# Altium PCB 飞控PCB.PcbDoc
Units mil, origin at the board's own origin, x right, y up, seen from the top; angles counter-clockwise.
Board outline 1240.05 x 855.03 mil, 2 copper layers (Top Layer, Bottom Layer); 32 components, 51 nets, 199 pads, 48 vias.
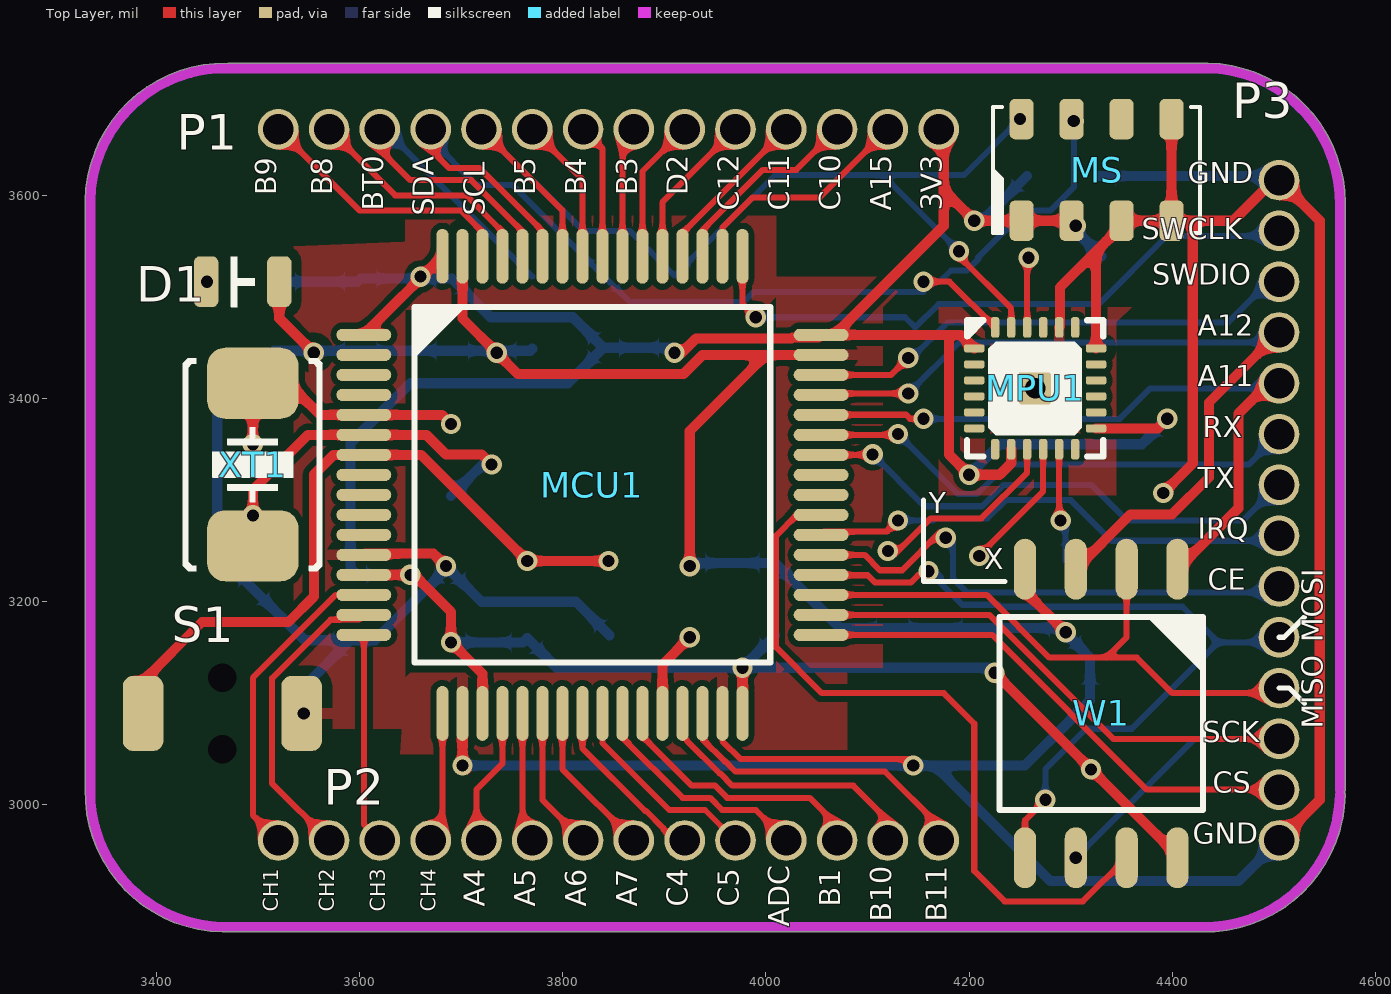
[diagram p0: Top Layer view]
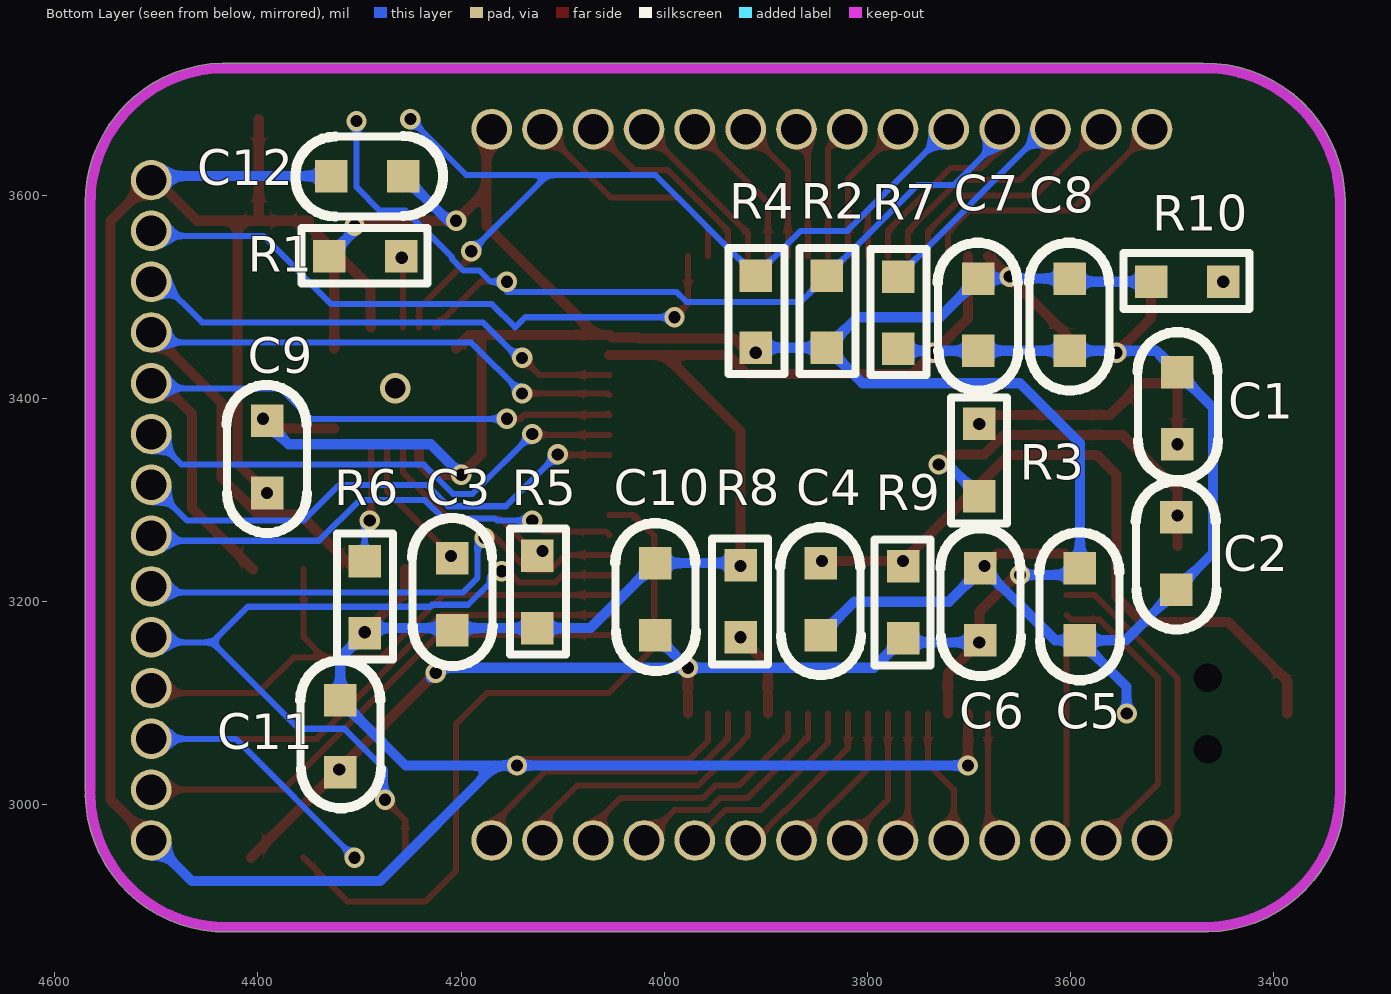
[diagram p1: Bottom Layer view, seen from below]
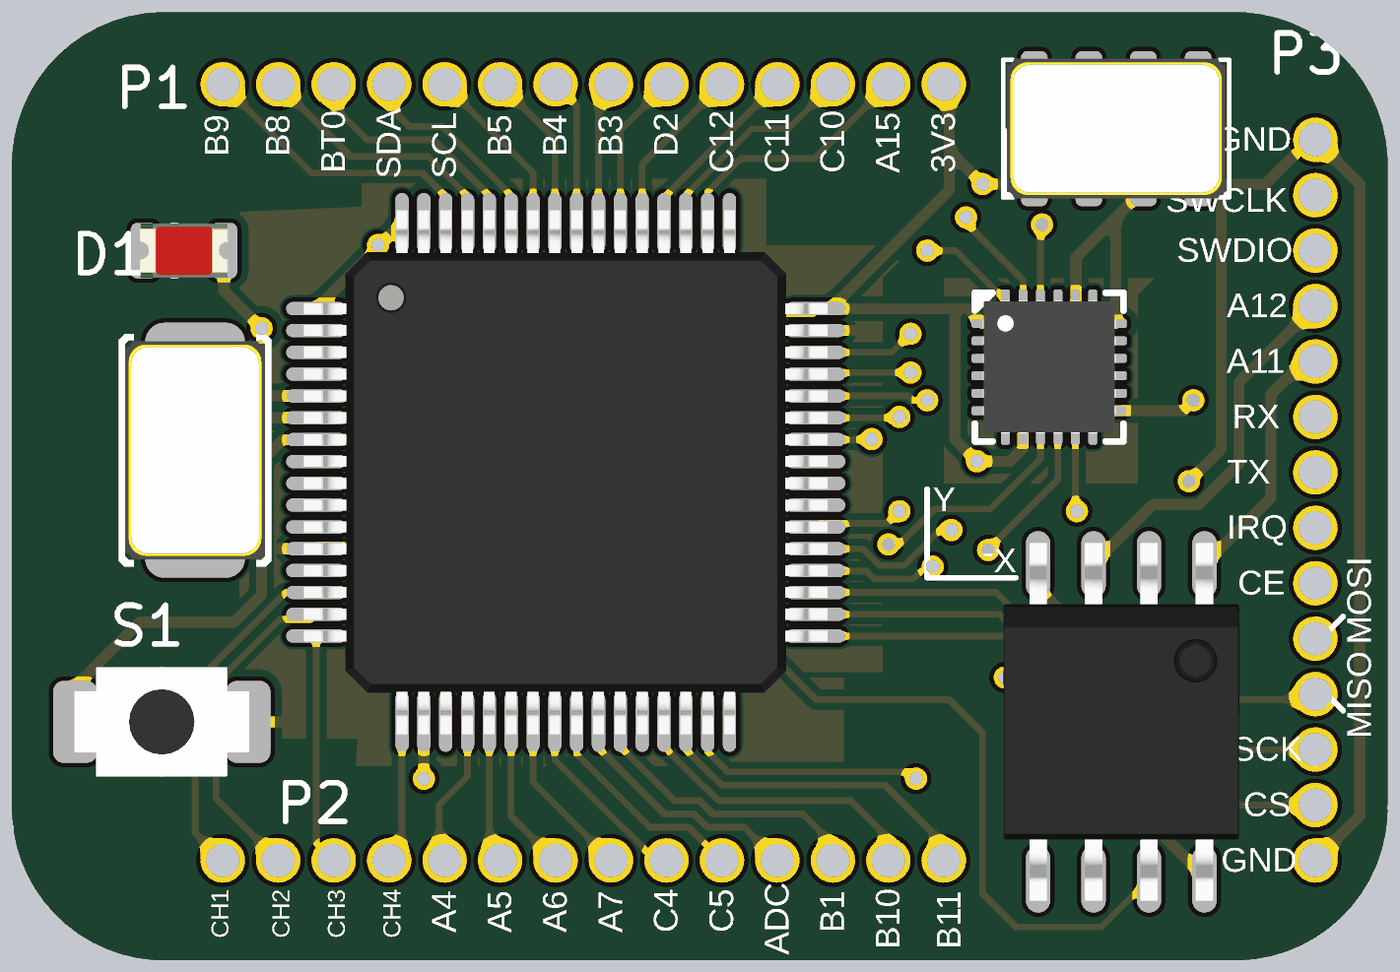
[diagram p2: 3D render of the assembled board from above, using the file's embedded part models]
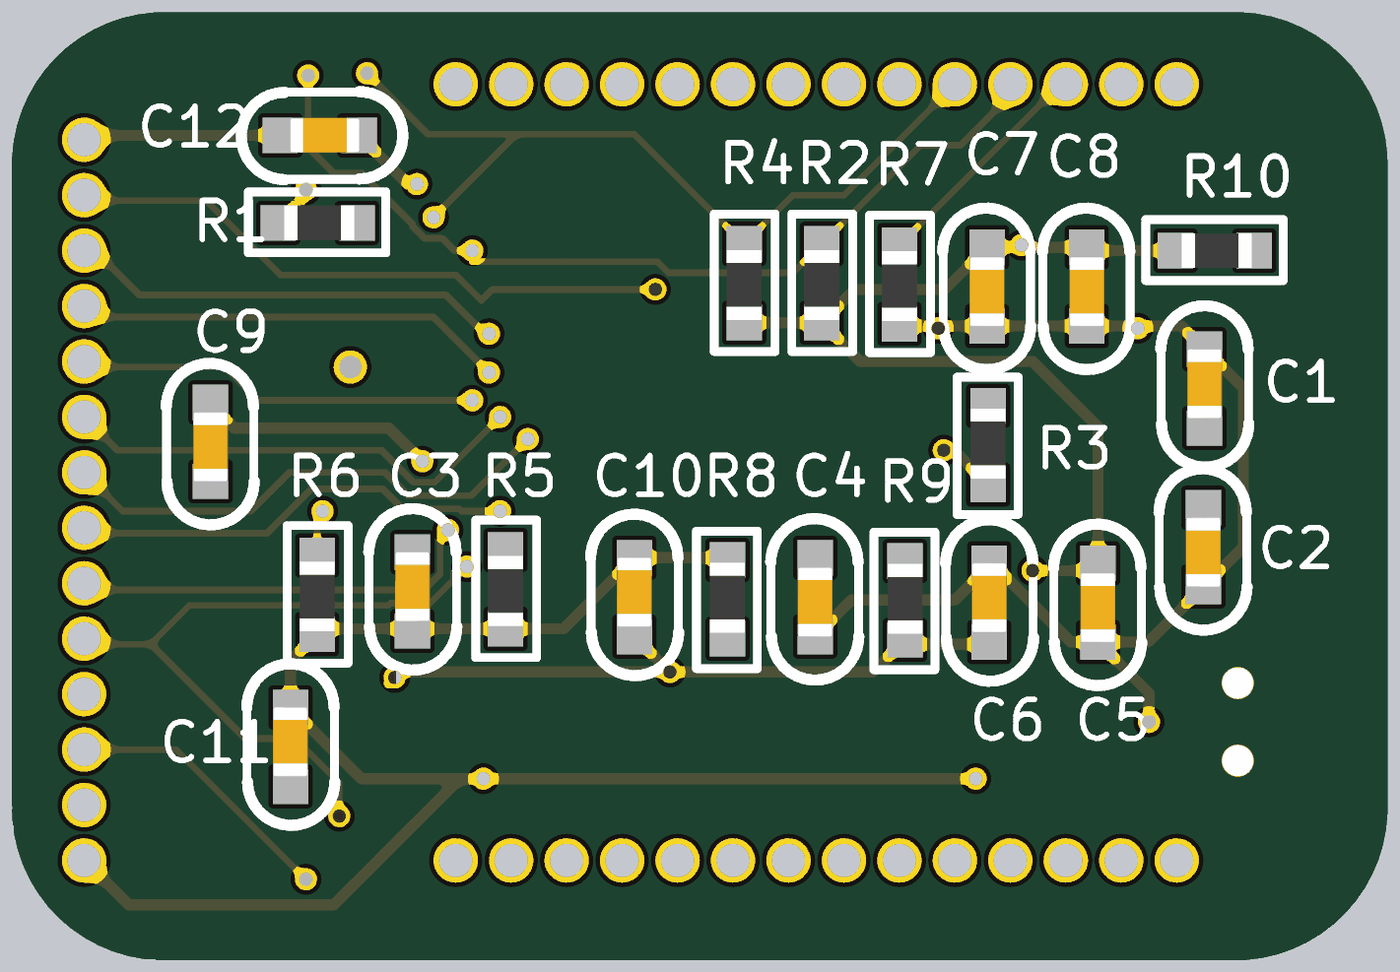
[diagram p3: 3D render of the assembled board from below, using the file's embedded part models]

## Layer stack, top to bottom
Top Solder: solder mask 0.4, Solder Resist, Dk 3.5
Top Layer: signal copper 1.4
Dielectric 1: dielectric 12.6, FR-4, Dk 4.8
Bottom Layer: signal copper 1.4
Bottom Solder: solder mask 0.4, Solder Resist, Dk 3.5

## Board outline
3329.99,3015.05 ccw(c3467.5,3012.5) 3464.91,2874.99 ccw(c3465,2880) 3465,2874.99 4429.95,2874.99 ccw(c4432.5,3012.5) 4570.01,3009.91 ccw(c4565,3010) 4570.02,3010 ccw(c4565,3010) 4569.35,3012.5 ccw(c4565,3015) 4570.02,3015 4570.02,3589.95 ccw(c4432.5,3592.5) 4570.04,3592.5 ccw(c4432.5,3592.5) 4435.09,3730.01 ccw(c4435,3725) 4435,3730.01 3470.05,3730.01 cw(c3467.5,3592.5) 3470.09,3730.01 3470.05,3730.01 ccw(c3467.5,3592.5) 3329.99,3595.09 ccw(c3335,3595) 3329.99,3595 3329.99,3015.05 cw(c3467.5,3012.5)

## Design rules (kind name [scope] priority, off if disabled: settings)
Clearance [All] p1: gap=6 ignorepadtopadclearanceinfootprint=FALSE
PolygonConnect [All] p1: connectstyle=Relief reliefconductorwidth=10 reliefentries=4 polygonreliefangle="90 Angle" airgapwidth=10
RoutingVias [All] p1: holewidth=28 width=50 viastyle="Through Hole" minholewidth=28 minwidth=50 maxholewidth=28 maxwidth=50
SolderMaskExpansion [All] p1: expansion=4
Width [All] p1: maxlimit=10 minlimit=6 preferedwidth=10 minimp=50.000000 maximp=50.000000 favimp=50.000000
30 further rules are at their usual default settings.

## Components (designator, comment, footprint, x,y, rotation, side; value= is the part's Value field where it differs from the comment)
C1 "Cap_0603" CAP_0603 3496,3393 r270 bottom value=20pf
C2 "Cap_0603" CAP_0603 3495,3245 r90 bottom value=20pf
C3 "Cap_0603" CAP_0603 4210,3210 r270 bottom value=0.1u
C4 "Cap_0603" CAP_0603 3845,3200 r90 bottom value=0.1u
C5 "Cap_0603" CAP_0603 3590,3195 r90 bottom value=0.1u
C6 "Cap_0603" CAP_0603 3690,3200 r270 bottom value=0.1u
C7 "Cap_0603" CAP_0603 3690,3480 r90 bottom value=0.1u
C8 "Cap_0603" CAP_0603 3600,3480 r90 bottom value=0.1u
C9 "Cap_0603" CAP_0603 4390,3340 r90 bottom value=0.1u
C10 "Cap_0603" CAP_0603 4010,3205 r270 bottom value=0.1u
C11 "Cap_0603" CAP_0603 4320,3070 r270 bottom value=0.1u
C12 "Cap_0603" CAP_0603 4290,3620 r0 bottom value=0.1u
D1 "LED_0805" LED_0805_RED 3485,3515 r0 top
MCU1 "STM32F103RC" LQFP_P0.5_64 3829.21,3315 r0 top
MPU1 "MPU9250" QFN_P0.4_24 4265,3410 r0 top
MS "MS5611" OTHER_MS5611_8 4325.39,3625 r90 top (schematic designator MS1)
P1 "HDR1X14_1.27" HDR1X14_1.27 3820,3665 r90 top
P2 "HDR1X14_1.27" HDR1X14_1.27 3820,2965 r90 top
P3 "HDR1X14_1.27" HDR1X14_1.27 4505,3315 r0 top
R1 "Res_0603" RES_0603 4293,3622 r180 bottom value=10K
R2 "Res_0603" RES_0603 3758,3484 r270 bottom value=10K
R3 "Res_0603" RES_0603 3772,3341 r90 bottom value=1M
R4 "Res_0603" RES_0603 3828,3484 r270 bottom value=10K
R5 "Res_0603" RES_0603 4043,3208 r270 bottom value=10K
R6 "Res_0603" RES_0603 4213,3203 r270 bottom value=10K
R7 "Res_0603" RES_0603 3688,3483 r270 bottom value=10K
R8 "Res_0603" RES_0603 4007,3202 r90 bottom value=10K
R9 "Res_0603" RES_0603 3847,3201 r90 bottom value=10K
R10 "Res_0603" RES_0603 3484,3597 r180 bottom value=10K
S1 "ButtonTACT_3x4x2_180" ButtonTACT_3x4x2_180H 3465,3090 r0 top
W1 "W25Q_8" SOIC_E200_8 4330,3090 r270 top
XT1 "XTAL_5032_2P" XT_5032_2 3495,3335 r90 top value=8M

## Footprints (in the part's own frame and the unit in brackets; to place one, negate y for a bottom-side part, rotate by r counter-clockwise, add the part's x,y. Pads: shape width x height; smd on the part's side, far side on the other; paste and mask are expansions set on the pad)
ButtonTACT_3x4x2_180H [mil]
  round 0 hole 28: 0(0,-35) 0(0,35)
  rrect50% 40x74 smd: 1(-78,0) 2(78,0)
  body extent -79,-49 79,49, height 63
CAP_0603 [mil]
  rect 32x32 smd: 1(-33,1) 2(38,1)
  silkscreen extent -72,-38 73,41, body extent -33,-15 30,17, height 31
HDR1X14_1.27 [mil]
  round 40 hole 30: 1(0,300) 2(0,250) 3(0,200) 4(0,150) 5(0,100) 6(0,50) 7(0,0) 8(0,-50) 9(0,-100) 10(0,-150) 11(0,-200) 12(0,-250) 13(0,-300) 14(0,-350)
LED_0805_RED [mil]
  rrect50% 24x50 smd: 1(-36,0) 2(36,0)
  silkscreen extent -12,-24 12,24, body extent -40,-25 40,25, height 43
LQFP_P0.5_64 [mil]
  oval 54x12 smd: 1(-225,147.64) 2(-225,127.95) 3(-225,108.27) 4(-225,88.58) 5(-225,68.9) 6(-225,49.21) 7(-225,29.53) 8(-225,9.84) 9(-225,-9.84) 10(-225,-29.53) 11(-225,-49.21) 12(-225,-68.9) 13(-225,-88.58) 14(-225,-108.27) 15(-225,-127.95) 16(-225,-147.64) 33(225,-147.64) 34(225,-127.95) 35(225,-108.27) 36(225,-88.58) 37(225,-68.9) 38(225,-49.21) 39(225,-29.53) 40(225,-9.84) 41(225,9.84) 42(225,29.53) 43(225,49.21) 44(225,68.9) 45(225,88.58) 46(225,108.27) 47(225,127.95) 48(225,147.64)
  oval 12x54 smd: 17(-147.64,-225) 18(-127.95,-225) 19(-108.27,-225) 20(-88.58,-225) 21(-68.9,-225) 22(-49.21,-225) 23(-29.53,-225) 24(-9.84,-225) 25(9.84,-225) 26(29.53,-225) 27(49.21,-225) 28(68.9,-225) 29(88.58,-225) 30(108.27,-225) 31(127.95,-225) 32(147.64,-225) 49(147.64,225) 50(127.95,225) 51(108.27,225) 52(88.58,225) 53(68.9,225) 54(49.21,225) 55(29.53,225) 56(9.84,225) 57(-9.84,225) 58(-29.53,225) 59(-49.21,225) 60(-68.9,225) 61(-88.58,225) 62(-108.27,225) 63(-127.95,225) 64(-147.64,225)
  silkscreen extent -175,-175 175,175, body extent -236,-236 236,236, height 59
OTHER_MS5611_8 [mil]
  rrect50% 40x24 smd: 1(-50,73.82) 2(-50,24.61) 3(-50,-24.61) 4(-50,-73.82) 5(50,-73.82) 6(50,-24.61) 7(50,24.61) 8(50,73.82)
  silkscreen extent -62,-102 62,102, body extent -63,-98 63,98, height 39
QFN_P0.4_24 [mil]
  rrect50% 20x8 smd: 1(-60,39.37) 2(-60,23.62) 3(-60,7.87) 4(-60,-7.87) 5(-60,-23.62) 6(-60,-39.37) 13(60,-39.37) 14(60,-23.62) 15(60,-7.87) 16(60,7.87) 17(60,23.62) 18(60,39.37)
  rrect50% 8x20 smd: 7(-39.37,-60) 8(-23.62,-60) 9(-7.87,-60) 10(7.87,-60) 11(23.62,-60) 12(39.37,-60) 19(39.37,60) 20(23.62,60) 21(7.87,60) 22(-7.87,60) 23(-23.62,60) 24(-39.37,60)
  rrect20% 45x45 smd: 25(0,0)
  silkscreen extent -67,-67 67,67, body extent -60,-60 60,60, height 39
RES_0603 [mil]
  rect 32x32 smd: 1(-37,-82) 2(34,-82)
  silkscreen extent -64,-109 60,-54, body extent -31,-98 31,-66, height 18
SOIC_E200_8 [mil]
  oval 60x22 smd: 1(-142,75) 2(-142,25) 3(-142,-25) 4(-142,-75) 5(142,-75) 6(142,-25) 7(142,25) 8(142,75)
  silkscreen extent -95,-100 95,100, body extent -161,-106 161,106, height 84
XT_5032_2 [mil]
  rrect50% 70x90 smd: 1(-80,0) 2(80,0)
  silkscreen extent -104,-68 104,68, body extent -98,-63 98,63, height 39

## Part data
C1 C2 C3 C4 C5 C6 C7 C8 C9 C10 C11 C12: "Capacitor"
D1: "LED"
MCU1: "MCU"
MS: "Sensor"
R1 R2 R3 R4 R5 R6 R7 R8 R9 R10: "Resistor"
S1: "Button"
W1: "FLASH"
XT1: "Crystal Oscillator"

## Via types
v1: diameter 20, hole 12, Top Layer to Bottom Layer, 47 vias
v2: diameter 30, hole 20, Top Layer to Bottom Layer, 1 vias

## Nets (pads, with @x,y where several pads share a name; then routed paths per layer and width w, separated by ;. In a path a pad name is that pad's centre, name@x,y a point inside that pad or via, vN(x,y) a via of type N, cw(c..) or ccw(c..) an arc to the next point about the centre after c; other vN are vias at no path point)
3V3: C5.2 C6.2 C7.2 C8.2 C9.2 C10.2 C11.2 C12.1 MCU1.1 MCU1.13 MCU1.19 MCU1.32 MCU1.48 MCU1.64 MPU1.1 MPU1.8 MPU1.13 MS.1 MS.2 P1.14 R1.1 R2.2 R4.2 R9.1 R10.1 W1.8 | length 3410
  Top Layer w10: MCU1.13 v1(3650,3226.42) 3653.58,3226.42 3690,3190 v1(3690,3160) 3720.94,3129.06 MCU1.19 ; MCU1.1 MCU1.64 ; v1(3910,3445) 3917.07,3445 3931.02,3458.95 4025.17,3458.95 4026.17,3459.95 4051.53,3459.95 MCU1.48 MCU1.48@4067.64,3462.64 ; MCU1.32 v1(3976.85,3135) ; P1.14@4175,3650 4175,3605 ; MPU1.1 4191.73,3462.64 4185,3462.64 ; v1(4225,3130) v1(4320,3035) W1.8@4407,2948 ; MPU1.8 4241.38,3336.38 4230,3325 v1(4200,3325) 4180,3345 4180,3457.64 4185,3462.64 ; MS.2 MS.1 v1(4205,3575) 4175,3605 ; MPU1.13 4385.63,3370.63 v1(4395,3380) ; MCU1.48@4067.64,3462.64 4185,3462.64 ; MCU1.48@4067.64,3462.64 4175,3570 4175,3605
  Bottom Layer w10: R10.1 3598,3515 C8.2 C7.2 3729,3480 3810,3480 R2.2 ; v1(3650,3226.42) 3597.58,3226.42 C5.2 3591,3356 3650,3415 3805,3415 R2.2 ; v1(3690,3160) 3761,3160 R9.1 3794,3135 3975,3135 3976.85,3136.85 v1(3976.85,3135) v1@3977,3135 ; R4.2 R2.2 ; C10.2 v1@3977,3135 ; v1(4200,3325) 4230,3355 4370,3355 v1(4395,3380) ; v1(4205,3575) 4213,3575 C12.1 ; v1@4230,3125 v1(4225,3130) 4220,3135 v1@3977,3135 ; v1(4305,3570) 4305,3565 R1.1
  other v1: 3660,3520
ADC: MCU1.26 P2.11 | length 226.9
  Top Layer w6: MCU1.26 3858.74,3066.26 3918,3007 3944.97,3007 3956.97,2995 3990,2995 P2.11
BOOT0: MCU1.60 P1.3 R7.1 | length 428.3
  Top Layer w6: P1.3 3620,3645 3650,3615 3710,3615 3760.32,3564.68 MCU1.60
  Bottom Layer w6: P1.3 3625,3665 R7.1
BOOT1: MCU1.28 R8.1 | length 86.1
  Top Layer w10: MCU1.28 3898.11,3138.11 v1(3925,3165)
CE: MCU1.37 P3.9 | length 516.8
  Top Layer w6: MCU1.37 4097.03,3246.1 4112.13,3231 4134.13,3231 4171.77,3268.64 4177,3263.41 v1(4177,3263)
  Bottom Layer w6: v1(4177,3263) 4184,3256 4184,3223.27 4198.27,3209 P3.9@4505,3209
CSN: MCU1.33 P3.13 | length 511.9
  Top Layer w6: MCU1.33 4222.64,3167.36 4375,3015 P3.13@4503,3015
GND: C1.1 C2.1 C3.2 C4.1 C5.1 C6.1 C7.1 C8.1 C9.1 C10.1 C11.1 C12.2 D1.2 MCU1.12 MCU1.18 MCU1.31 MCU1.47 MCU1.63 MPU1.18 MPU1.20 MS.3 MS.4 MS.5 P3.1 P3.14 R5.2 R6.2 R7.2 R8.2 S1.2 W1.4 | length 5396.2
  Top Layer w6: MCU1.31 3957.17,3062.83 3975,3045 4138.74,3045 v1(4145,3038.74)
  Top Layer w10: D1.2 3521,3479 v1(3555,3445) ; MCU1.12 3605.53,3247.42 3672.58,3247.42 v1(3685,3235) ; MCU1.18 v1(3701.26,3038.74) v1@3705,3035 ; MCU1.63 3701.26,3478.74 v1(3735,3445) 3756,3424 3918.7,3424 3937.65,3442.95 4000,3442.95 ; v1(3925,3235) 3925,3367.95 4000,3442.95 ; MCU1.47 4000,3442.95 ; W1.4 4255,3210 v1(4295,3170) ; MPU1.20 4289.37,3470.75 4289.37,3509.37 4325,3545 ; MPU1.18 4325,3545 ; v1(4391,3307) 4420,3336 4420,3575 ; MS.5 MS.4 ; 4487.5,3602.5 4460,3575 4420,3575 ; P3.14 4545,3005 4545,3575 P3.1 ; 4325,3545 4350,3570 MS.3 MS.4 ; MS.4 4420,3575
  Bottom Layer w10: v1(3545,3090) 3545,3116 C5.1 ; v1(3701.26,3038.74) v1(4145,3038.74) 4166.26,3038.74 ; R7.2 3768,3447 C7.1 C8.1 3516,3447 C1.1 3460,3391 3460,3248 C2.1 3546,3162 C5.1 ; C4.1 3813,3200 3720,3200 v1(3685,3235) 3685,3231.72 3615.28,3162 C5.1 ; R8.2 3927,3238 C10.1 4073,3174 R5.2 R6.2@4290,3174 ; R6.2 4319,3145 C11.1 4298.44,3082.44 4254.74,3038.74 4166.26,3038.74 ; C12.2 4501,3619 P3.1 ; P3.14 4465,2925 4280,2925 4166.26,3038.74
HOLD: MCU1.39 W1.7 | length 714
  Top Layer w6: MCU1.39 4030.47,3285.47 4010,3265 4010,3155 4055,3110 4175,3110 4205,3080 4205,2935 4235,2905 4312,2905 W1.7
IRQ: MCU1.38 P3.8 | length 481.5
  Top Layer w6: MCU1.38 4057.43,3269 4119,3269 v1(4130,3280)
  Bottom Layer w6: v1(4130,3280) 4164.49,3280 4166.49,3282 4182.19,3282 4217.81,3282 4235.81,3300 4300,3300 4340,3260 P3.8@4505,3260
MISO: MCU1.35 P3.11 W1.2 | length 586.1
  Top Layer w6: MCU1.35 4217.21,3206.73 4278.94,3145 4335,3145 ; W1.2 4355,3165 4335,3145 ; P3.11@4505,3110 4400,3110 4365,3145 4335,3145
MOSI: MCU1.36 P3.10 W1.5 | length 798.1
  Top Layer w6: MCU1.36 4054.63,3226 4100.16,3226 4107.16,3219 4142.84,3219 4149.84,3226 ; W1.5 4255,2985 v1(4275,3005)
  Bottom Layer w6: v1(4160,3230) 4166,3230 4172,3224 4172,3218.3 4193.3,3197 4228.73,3197 4230.73,3195 4410,3195 4445,3160 ; v1(4275,3005) 4275,3035 4315,3075 4360,3075 4445,3160 ; P3.10 4495,3165 4490,3160 4445,3160
NetC1_2: C1.2 MCU1.5 R3.2 XT1.2 | length 271.6
  Top Layer w10: v1(3495,3355) XT1.2 3530,3415 3561.1,3383.9 MCU1.5 3681.1,3383.9 v1(3690,3375)
NetC2_2: C2.2 MCU1.6 R3.1 XT1.1 | length 377.4
  Top Layer w10: XT1.1 v1(3495,3285) 3495,3310 3549.21,3364.21 MCU1.6 3665.79,3364.21 3685,3345 3720,3345 v1(3730,3335)
  Bottom Layer w10: R3.1 3721,3335 v1(3730,3335)
NetC3_1: C3.1 MPU1.10 | length 131
  Top Layer w6: v1(4210,3245) 4210,3245.72 4272.87,3308.59 MPU1.10
NetD1_1: D1.1 R10.2
  other v1: 3450,3515
NetMPU1_9: MPU1.9 R5.1 | length 191.9
  Top Layer w6: v1(4120,3250) 4130,3250 4162,3282 4212,3282 4257.13,3327.13 MPU1.9
NetMPU1_11: MPU1.11 R6.1 | length 122.6
  Top Layer w6: MPU1.11 4288.62,3281.38 v1(4290,3280)
  Bottom Layer w6: v1(4290,3280) 4295,3285 R6.1
NetMPU1_22: MPU1.22 R1.2 | length 71.2
  Top Layer w6: MPU1.22 4257.13,3537.13 v1(4258.56,3538.56) v1@4260,3540
NRST: C4.2 MCU1.7 R9.2 S1.1 | length 695.8
  Top Layer w10: S1.1 3387,3122 3445,3180 3530,3180 3555,3205 3555,3325 3574.53,3344.53 MCU1.7 3660.47,3344.53 v1(3765,3240) v1(3845,3240)
PA4: MCU1.20 P2.5 | length 137.7
  Top Layer w6: P2.5 3715,2970 3715,3015 3740.63,3040.63 MCU1.20
PA5: MCU1.21 P2.6 | length 129
  Top Layer w6: MCU1.21 3760.32,2974.69 P2.6
PA6: MCU1.22 P2.7 | length 141.6
  Top Layer w6: MCU1.22 3780,3005 P2.7
PA7: MCU1.23 P2.8 | length 154.1
  Top Layer w6: MCU1.23 3799.68,3035.32 P2.8
PA15: MCU1.50 P1.13 | length 231.1
  Top Layer w6: MCU1.50 3957.17,3568.22 3986.97,3598.03 4053.03,3598.03 P1.13
PB1: MCU1.27 P2.12 | length 265.3
  Top Layer w6: MCU1.27 3878.43,3067.47 3926.9,3019 3949.94,3019 3961.94,3007 4043,3007 4070,2980 P2.12
PB3: MCU1.55 P1.8 | length 129.7
  Top Layer w6: MCU1.55 3858.74,3653.74 P1.8
PB4: MCU1.56 P1.7 | length 132.9
  Top Layer w6: P1.7 3839.06,3645.95 MCU1.56
PB5: MCU1.57 P1.6 | length 145.5
  Top Layer w6: P1.6 3819.37,3615.63 MCU1.57
PB8: MCU1.61 P1.2 | length 236.7
  Top Layer w6: P1.2 3635,3600 3705,3600 3740.63,3564.37 MCU1.61
PB9: MCU1.62 P1.1 | length 266.8
  Top Layer w6: P1.1 3600,3585 3700,3585 3720.94,3564.06 MCU1.62
PB10: MCU1.29 P2.13 | length 278.9
  Top Layer w6: MCU1.29 3917.8,3068.12 3922.48,3063.43 3922.48,3062.79 3954.27,3031 3954.91,3031 3966.91,3019 4086,3019 4120,2985 P2.13
PB11: MCU1.30 P2.14 | length 307.9
  Top Layer w6: MCU1.30 3937.48,3064.76 3959.24,3043 3959.88,3043 3970,3032.88 4117.12,3032.88 4170,2980 P2.14
PC4: MCU1.24 P2.9 | length 173.1
  Top Layer w6: MCU1.24 3819.37,3055.63 3881,2994 3882.01,2994 3899,2977.01 3899,2976 3910,2965 P2.9
PC5: MCU1.25 P2.10 | length 199.7
  Top Layer w6: MCU1.25 3839.06,3060.94 3905,2995 3940,2995 P2.10
PC10: MCU1.51 P1.12 | length 199.2
  Top Layer w6: MCU1.51 3937.48,3565.51 3996.97,3625 4030,3625 P1.12
PC11: MCU1.52 P1.11 | length 167.3
  Top Layer w6: MCU1.52 3917.8,3562.79 P1.11
PC12: MCU1.53 P1.10 | length 154.8
  Top Layer w6: MCU1.53 3898.11,3593.11 P1.10
PD2: MCU1.54 P1.9 | length 142.2
  Top Layer w6: MCU1.54 3878.43,3623.43 P1.9
RXD: MCU1.43 P3.6 | length 500
  Top Layer w6: MCU1.43 4129.21,3364.21 v1(4130,3365)
  Bottom Layer w6: v1(4130,3365) 4189,3306 4207.87,3306 4236.87,3335 4475,3335 P3.6
SCL: MCU1.58 MPU1.23 MS.8 P1.5 R4.1 | length 1013.8
  Top Layer w6: P1.5 3799.69,3585.32 MCU1.58 ; v1(4190,3545) 4190,3540 4241.38,3488.62 MPU1.23
  Bottom Layer w6: P1.5 3820,3565 3866,3565 R4.1 4009,3620 4115,3620 ; v1(4190,3545) 4115,3620 ; v1(4250,3675) 4195,3620 4115,3620
SCLK: MCU1.34 P3.12 W1.6 | length 744.8
  Top Layer w6: MCU1.34 4219.92,3187.05 4341.97,3065 P3.12@4500,3065
  Bottom Layer w6: v1(4305,2948) 4422,3065 P3.12
SDA: MCU1.59 MPU1.24 MS.7 P1.4 R2.1 | length 1105.4
  Top Layer w6: P1.4 3670,3645 3688,3627 3718,3627 3780,3565 MCU1.59 ; v1(4155,3515) 4180.63,3515 MPU1.24
  Bottom Layer w6: P1.4 3670,3655 3715,3610 3751,3610 R2.1 3866,3495 3978.13,3495 3988.13,3505 4155,3505 v1(4155,3515) 4171.13,3515 4182.13,3526 4197.87,3526 4209,3537.13 4209,3539 4255,3585 4280,3585 4303,3608 v1(4303,3673)
SWCLK: MCU1.49 P3.2 | length 621.9
  Top Layer w6: MCU1.49 3976.85,3493.15 v1(3990,3480)
  Bottom Layer w6: v1(3990,3480) 4136.87,3480 4146.87,3470 4169.87,3493 4327.73,3493 4394.73,3560 P3.2@4505,3560
SWDIO: MCU1.46 P3.3 | length 488.8
  Top Layer w6: MCU1.46 4123.27,3423.27 v1(4140,3440)
  Bottom Layer w6: v1(4140,3440) 4143.74,3440 4178.74,3475 4455,3475 4495,3515 P3.3
TIM5_CH1: MCU1.14 P2.1 | length 313.4
  Top Layer w6: P2.1 3495,2990 3495,3125 3576.73,3206.73 MCU1.14
TIM5_CH2: MCU1.15 P2.2 | length 299
  Top Layer w6: P2.2 3514,3021 3514,3124.87 3571.49,3182.36 3599.53,3182.36 MCU1.15
TIM5_CH3: MCU1.16 P2.3 | length 208.9
  Top Layer w6: MCU1.16 3604.21,2980.79 P2.3
TIM5_CH4: MCU1.17 P2.4 | length 129.8
  Top Layer w6: P2.4 3681.57,2976.58 MCU1.17
TXD: MCU1.42 P3.7 | length 509.8
  Top Layer w6: MCU1.42 4104.53,3344.53 v1(4105,3345)
  Bottom Layer w6: v1(4105,3345) 4156,3294 4212.84,3294 4233.84,3315 4320,3315 4355,3280 4470,3280 P3.7
WP: MCU1.44 P3.5 W1.1 | length 696
  Top Layer w6: MCU1.44 4055.32,3385 4056.32,3384 4137.87,3384 4141.87,3380 v1(4155,3380)
  Top Layer w10: W1.1 4465,3292 4465,3385 4495,3415 P3.5
  Bottom Layer w6: v1(4155,3380) 4348.27,3380 4378.27,3410 P3.5@4505,3410
WQCS: MCU1.45 P3.4 W1.3 | length 811.8
  Top Layer w6: MCU1.45 4055.63,3405 v1(4140,3405)
  Top Layer w10: W1.3 4305,3232.11 4358.89,3286 4399.7,3286 4436,3322.3 4436,3396 P3.4
  Bottom Layer w6: v1(4140,3405) 4190,3455 P3.4@4505,3455
pads on no net: MCU1.2 MCU1.3 MCU1.4 MCU1.8 MCU1.9 MCU1.10 MCU1.11 MCU1.40 MCU1.41 MPU1.2 MPU1.3 MPU1.4 MPU1.5 MPU1.6 MPU1.7 MPU1.12 MPU1.14 MPU1.15 MPU1.16 MPU1.17 MPU1.19 MPU1.21 MPU1.25 MS.6 S1.0
copper on no net:
  other v2: 4265,3410

## Polygon pours and split planes (outlines as drawn)
GND on Top Layer "Top Layer-No Net" (solid, pour order 10): 4170,3490 4360,3490 4345,3475 4345,3305 4170,3305
GND on Top Layer "Top Layer-No Net" (solid, pour order 8): 3645,3585 3650,3580 4010,3580 4010,3500 3997.56,3487.56 3645,3487.56
GND on Top Layer "Top Layer-No Net" (solid, pour order 6): 4010,3520 4115,3520 4130,3505 4115,3490 4115,3135 4020,3135 4010,3125
GND on Top Layer "Top Layer-No Net" (solid, pour order 4): 3645,3125 3650,3130 4080,3130 4080,3045 4075,3050 3640,3050
GND on Top Layer "Top Layer-No Net" (solid, pour order 2): 3535,3550 3535,3105 3510,3080 3515,3075 3645,3075 3645,3545 3655,3555

## Keep-outs
Keep-Out Layer:
  lines w10: 4565,3010 cw(c4432.5,3012.5) 4430,2880 3465,2880 cw(c3467.5,3012.5) 3335,3015 3335,3595 cw(c3467.5,3592.5) 3470,3725 4405,3725 4435,3725 cw(c4432.5,3592.5) 4565,3590 4565,3015

## Silkscreen, mask and mechanical layers (free items; w line width, h text height)
Top Overlay:
  lines w5: 4155,3300 4155,3220 4235,3220 ; 4505,3115 4515,3115 4530,3100 ; 4505,3165 4510,3165 4530,3185
  text "GND" at 4415,3605 h35
  text "B9" at 3525,3600 h35 r90
  text "B8" at 3580,3600 h35 r90
  text "B5" at 3780,3600 h35 r90
  text "B4" at 3830,3600 h35 r90
  text "B3" at 3880,3600 h35 r90
  text "D2" at 3930,3600 h35 r90
  text "BT0" at 3630,3585 h35 r90
  text "C12" at 3980,3585 h35 r90
  text "C11" at 4030,3585 h35 r90
  text "C10" at 4080,3585 h35 r90
  text "A15" at 4130,3585 h35 r90
  text "3V3" at 4180,3585 h35 r90
  text "SDA" at 3680,3580 h35 r90
  text "SCL" at 3730,3580 h35 r90
  text "SWCLK" at 4370,3550 h35
  text "SWDIO" at 4380,3505 h35
  text "A12" at 4425,3455 h35
  text "A11" at 4425,3405 h35
  text "RX" at 4430,3355 h35
  text "TX" at 4425,3305 h35
  text "Y" at 4160,3280 h35
  text "IRQ" at 4425,3255 h35
  text "X" at 4215,3225 h35
  text "CE" at 4435,3205 h35
  text "MOSI" at 4555,3160 h35 r90
  text "MISO" at 4555,3075 h35 r90
  text "SCK" at 4430,3055 h35
  text "CS" at 4440,3005 h35
  text "GND" at 4420,2955 h35
  text "A4" at 3730,2900 h35 r90
  text "A5" at 3780,2900 h35 r90
  text "A6" at 3830,2900 h35 r90
  text "A7" at 3880,2900 h35 r90
  text "C4" at 3930,2900 h35 r90
  text "C5" at 3980,2900 h35 r90
  text "B1" at 4080,2900 h35 r90
  text "CH1" at 3525,2895 h25 r90
  text "CH2" at 3580,2895 h25 r90
  text "CH3" at 3630,2895 h25 r90
  text "CH4" at 3680,2895 h25 r90
  text "B10" at 4130,2885 h35 r90
  text "B11" at 4185,2885 h35 r90
  text "ADC" at 4030,2880 h35 r90